# Altium PCB Motherboard.PcbDoc (part 1 of 2)
Units mm, origin at the board's own origin, x right, y up, seen from the top; angles counter-clockwise.
Board outline 237.88 x 115.44 mm, 4 copper layers (Top Layer, GND, 3V3, Bottom Layer), stack 0.603 mm thick; 165 components, 86 nets, 532 pads, 772 vias.
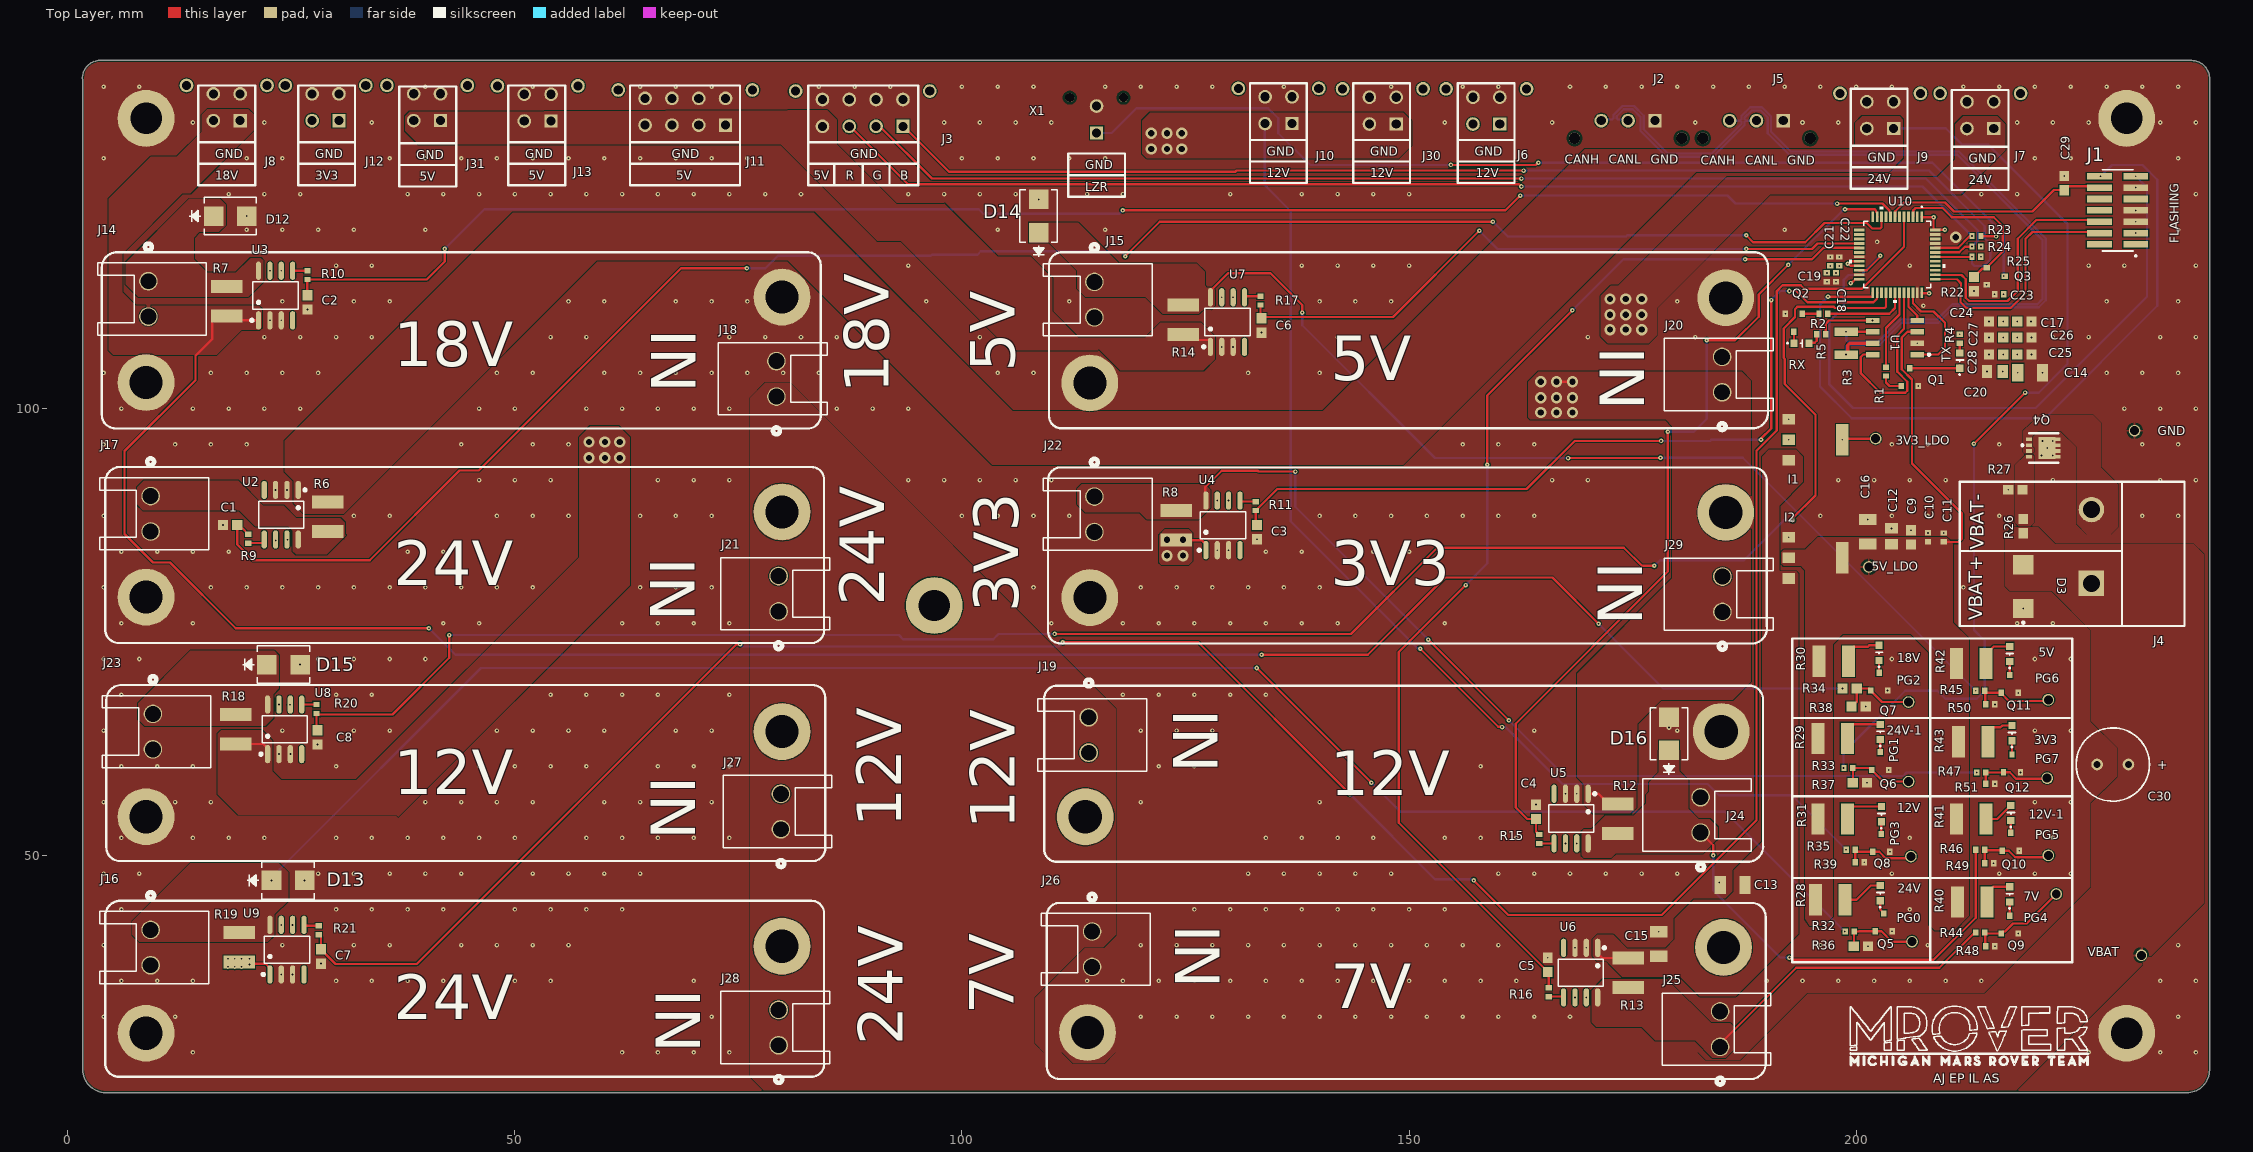
[diagram p0: Top Layer view]
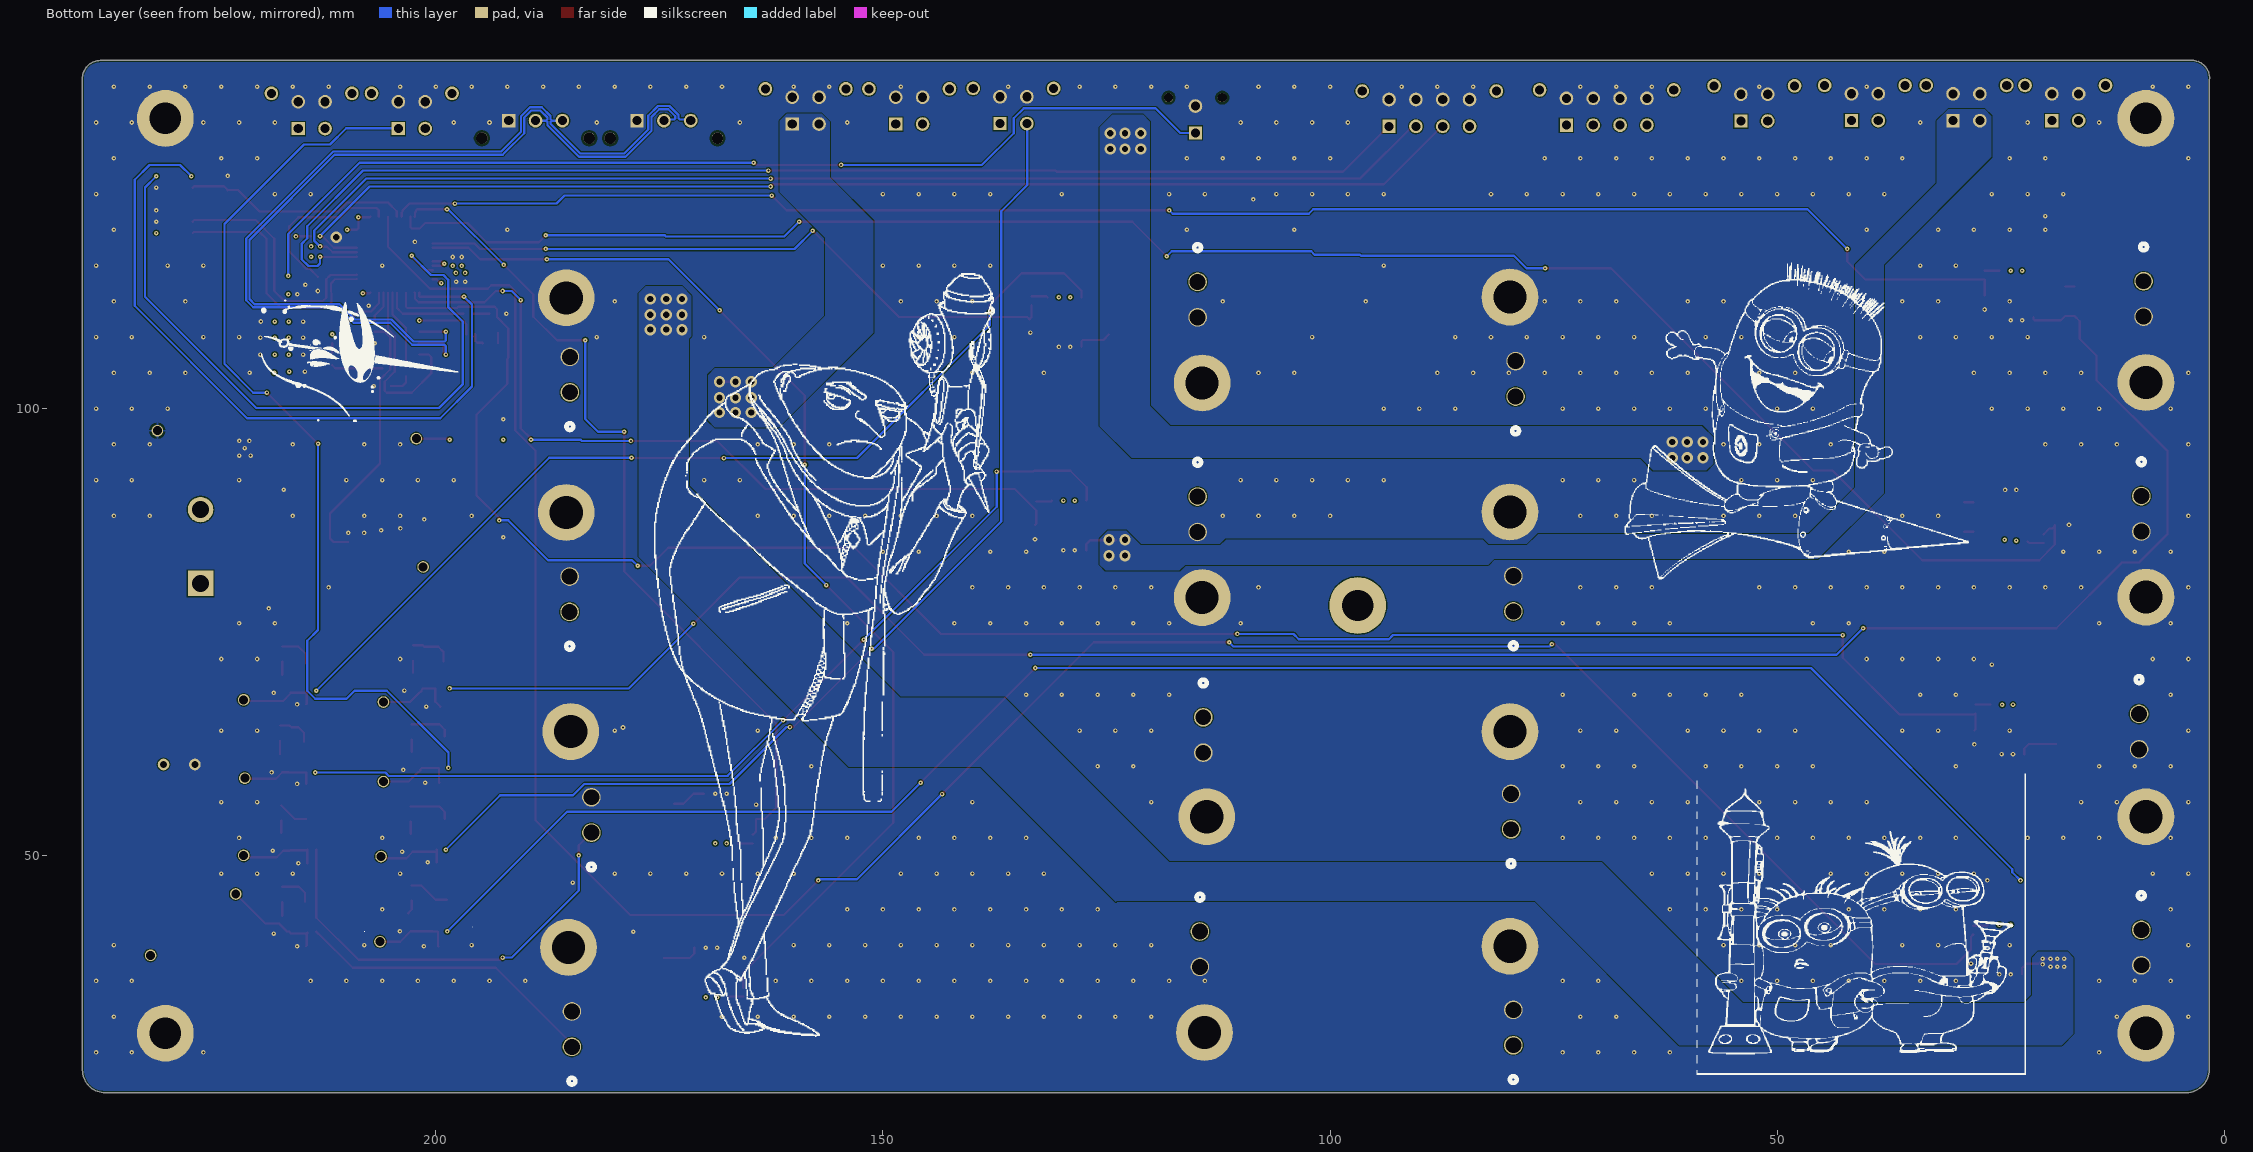
[diagram p1: Bottom Layer view, seen from below]
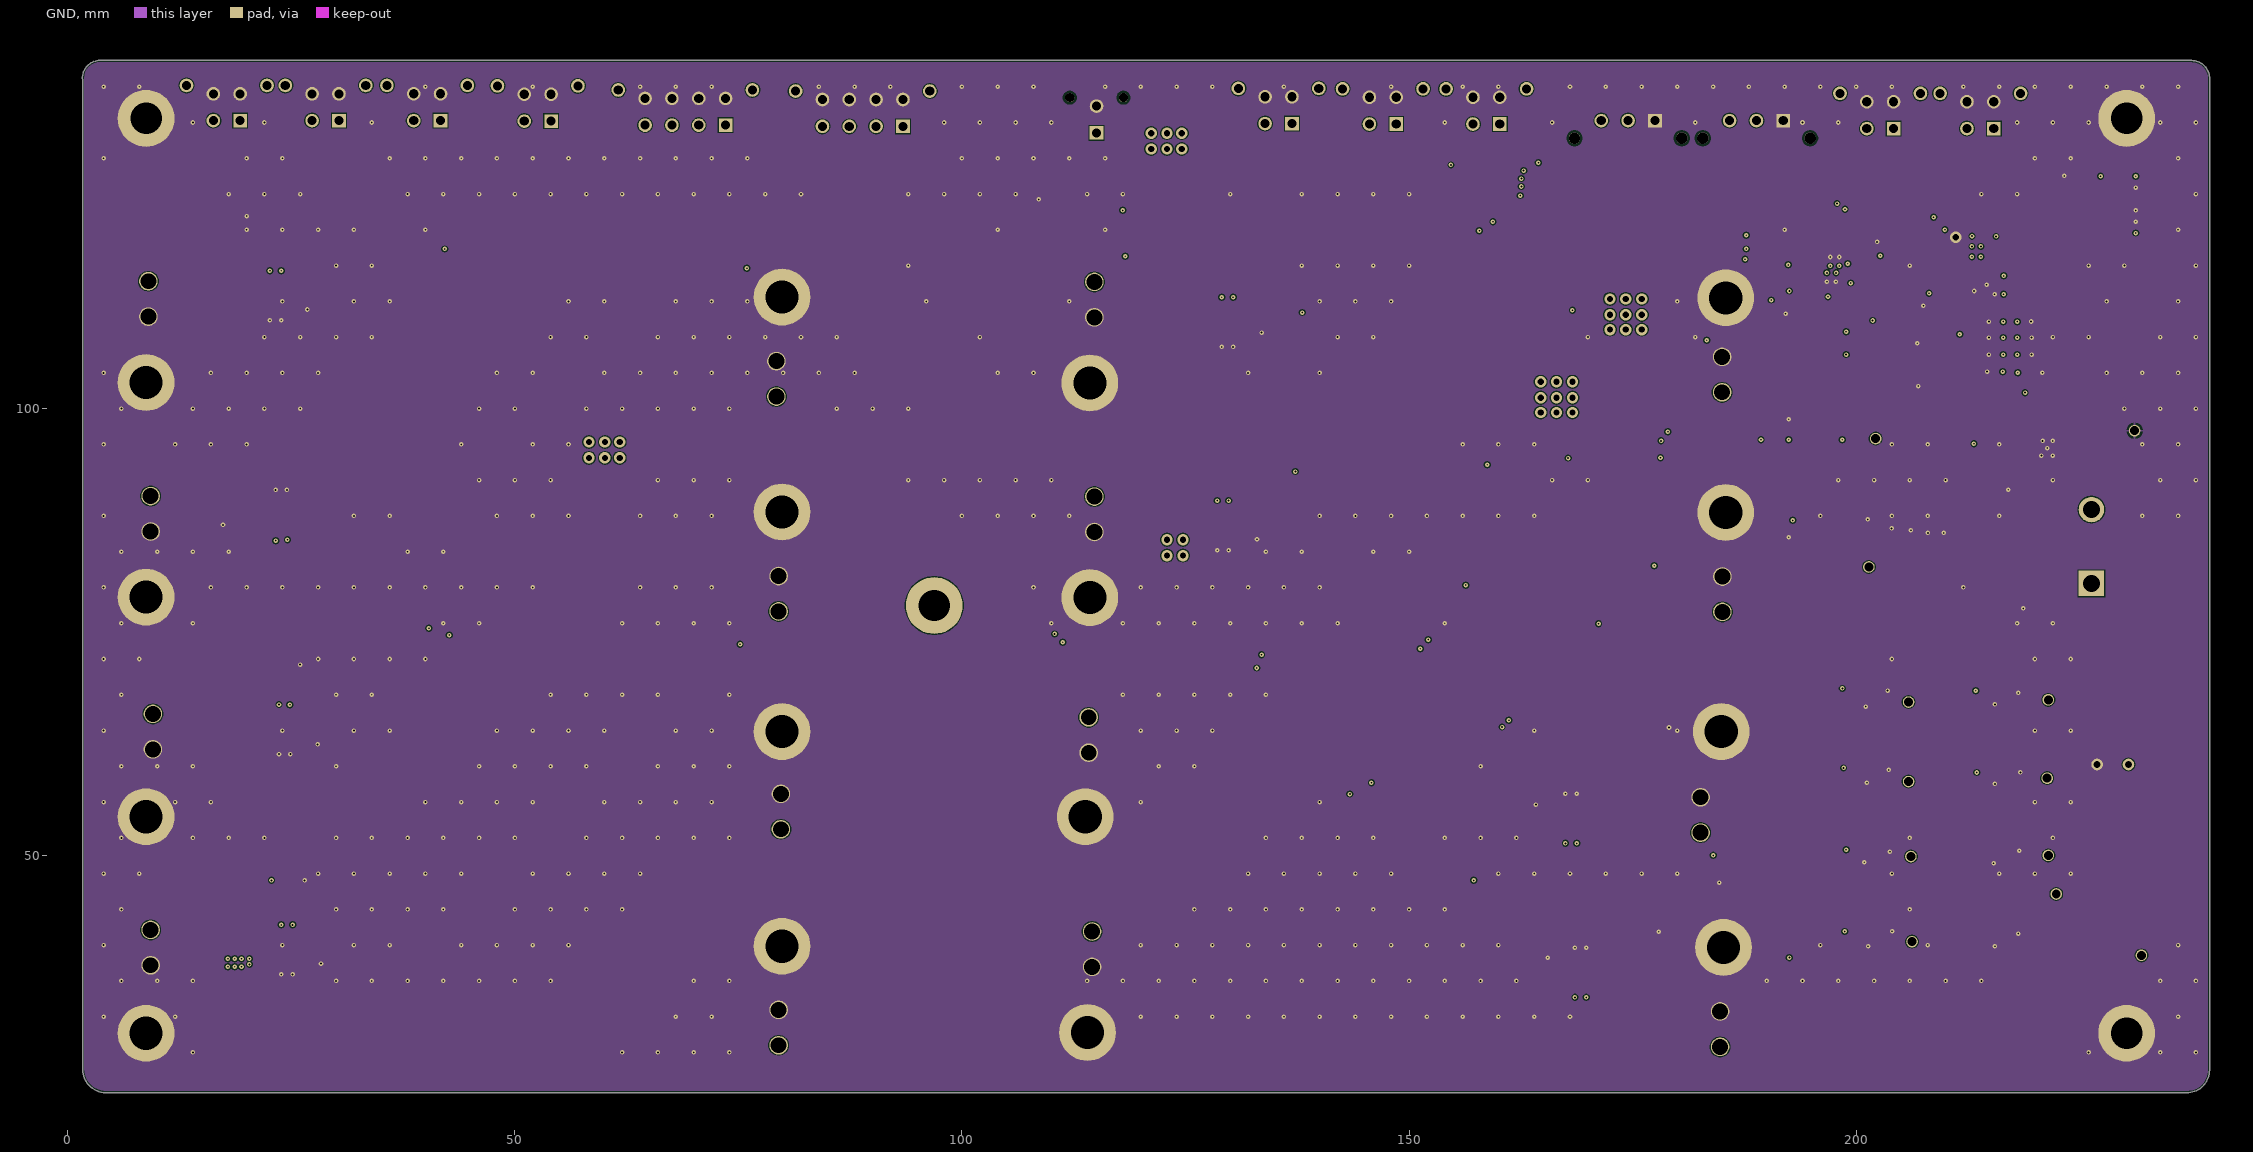
[diagram p2: GND]
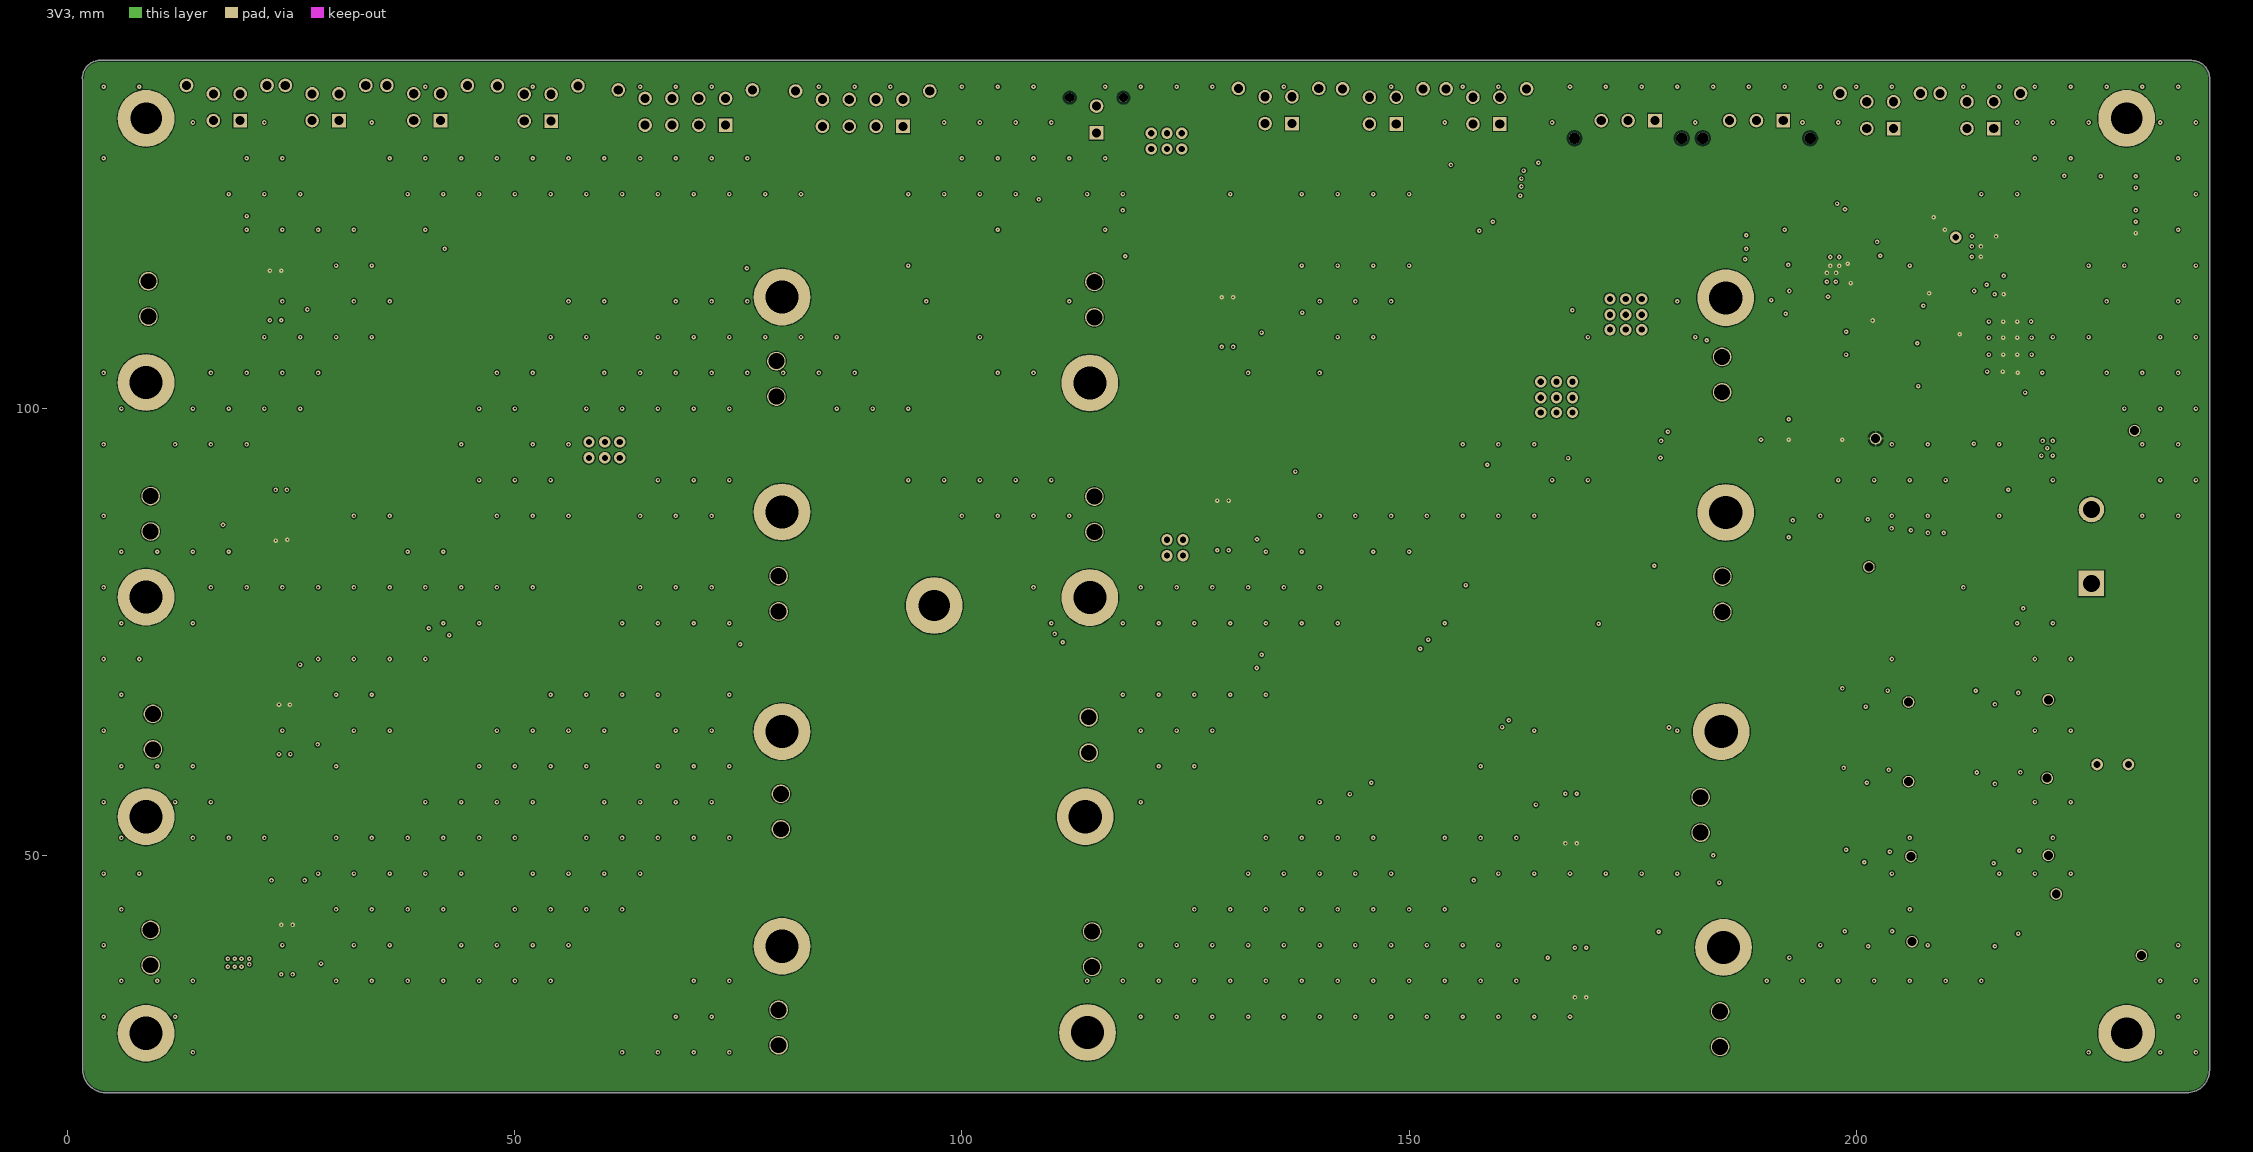
[diagram p3: 3V3]

## Layer stack, top to bottom
Top Solder: solder mask 0.0102, Solder Resist, Dk 3.5
Top Layer: signal copper 0.0356
Dielectric 2: prepreg 0.0711, PP-006, Dk 4.1
GND: signal copper 0.035
Dielectric 1: dielectric 0.32, FR-4, Dk 4.8
3V3: signal copper 0.035
Dielectric 3: prepreg 0.0711, PP-006, Dk 4.1
Bottom Layer: signal copper 0.0356
Bottom Solder: solder mask 0.0102, Solder Resist, Dk 3.5

## Board outline
4.191,23.495 cw(c4.318,26.162) 1.651,26.289 1.651,136.779 cw(c3.62,136.969) 3.429,138.938 237.363,138.938 cw(c237.49,136.906) 239.522,137.033 239.522,26.035 cw(c236.982,26.035) 236.982,23.495

## Design rules (kind name [scope] priority, off if disabled: settings)
BoardOutlineClearance [All] p1: gap=0.2 ignorepadtopadclearanceinfootprint=FALSE
Clearance "Stitching GND" [IsStitchingVia and InNet('GND') vs (IsVia and (Not IsStitchingVia)) Or IsPad] p1: gap=0.127 ignorepadtopadclearanceinfootprint=FALSE
Clearance [All] p2: gap=0.102 ignorepadtopadclearanceinfootprint=FALSE except(0.127: Arc-Via Track-Via SMDPad-Via THPad-Via Via-Via Via-Fill Via-Poly Via-Region Via-Text; 0.25: Arc-Hole Track-Hole SMDPad-Hole THPad-Hole Via-Hole Fill-Hole Poly-Hole Region-Hole Text-Hole)
ComponentClearance [All] p1: gap=0.102 collisioncheckmode=3 verticalgap=0.102 showdistances=TRUE
DiffPairsRouting [All] p1: maxlimit=0.102 minlimit=0.102 mostfreqgap=0.102 toplayer_minwidth=0.102 toplayer_maxwidth=1816.048 toplayer_prefwidth=0.102 midlayer1_minwidth=0.102 midlayer1_maxwidth=1816.048 midlayer1_prefwidth=0.102 midlayer2_minwidth=0.102 midlayer2_maxwidth=1816.048 midlayer2_prefwidth=0.102 bottomlayer_minwidth=0.102 bottomlayer_maxwidth=1816.048 bottomlayer_prefwidth=0.102 maxuncoupledlength=12.7
DiffPairsRouting USB [OnLayer('Top Layer') And InDifferentialPairClass('USB')] p2: maxlimit=0.127 minlimit=0.127 mostfreqgap=0.127 toplayer_maxgap=0.127 toplayer_prefgap=0.127 toplayer_minwidth=0.237 toplayer_maxwidth=0.237 toplayer_prefwidth=0.237 midlayer1_mingap=0.127 midlayer1_minwidth=0.089 midlayer1_maxwidth=0.089 midlayer1_prefwidth=0.089 midlayer2_mingap=0.127 midlayer2_minwidth=0.089 midlayer2_maxwidth=0.089 midlayer2_prefwidth=0.089 bottomlayer_maxgap=0.127 bottomlayer_prefgap=0.127 bottomlayer_minwidth=0.237 bottomlayer_maxwidth=0.237 bottomlayer_prefwidth=0.237 impedanceprofiledriven=TRUE impedanceprofileid={C8994B27-2D6B-4B4B-A1C4-DCAF0529D0FB} maxuncoupledlength=12.7
Height [All] p1: minheight=0 maxheight=1816.048 prefheight=12.7
HoleSize [All] p1: absolutevalues=TRUE maxlimit=6.3 minlimit=0.2 maxpercent=80.000 minpercent=20.000
HoleToHoleClearance [All] p1: gap=0.25 allowstackedmicrovias=FALSE
MinimumAnnularRing [All] p1: minimumring=0.076
MinimumSolderMaskSliver [All] p1: minsoldermaskwidth=0
PlaneClearance [All] p1: clearance=0.102
PlaneConnect PlaneConnectPowerPads [InPadClass('PowerPads')] p1: planeconnectstyle=Direct reliefexpansion=0.508 reliefentries=4 reliefconductorwidth=0.254 reliefairgap=0.254
PlaneConnect [All] p2: planeconnectstyle=Direct reliefexpansion=0.3 reliefentries=4 reliefconductorwidth=0.102 reliefairgap=0.102
PolygonConnect PolygonConnectPowerPads [All vs (InPadClass('PowerPads'))] p1: connectstyle=Direct reliefconductorwidth=0.254 reliefentries=4 polygonreliefangle="90 Angle" airgapwidth=0.254
PolygonConnect [All] p2: connectstyle=Direct reliefconductorwidth=0.102 reliefentries=4 polygonreliefangle="90 Angle" airgapwidth=0.102
RoutingVias [All] p1: holewidth=0.305 width=0.605 viastyle="Through Hole" minholewidth=0.3 minwidth=0.6 maxholewidth=0.405 maxwidth=0.705
SilkToSilkClearance [All] p1 off: silktosilkclearance=0.254
SilkToSolderMaskClearance [IsPad] p1 off: minsilkscreentomaskgap=0.254 clearancetoexposedcopper=TRUE
SolderMaskExpansion [All] p1: expansion=0.075 istentingtop=FALSE
SupplyNets "Schematic Supply Nets_21" [InNet('12V_FANS_C')] p1: voltage=0.000
SupplyNets "Schematic Supply Nets_20" [InNet('24V_ELSE_IN')] p2: voltage=0.000
SupplyNets "Schematic Supply Nets_19" [InNet('5V_BUCK_C')] p3: voltage=0.000
SupplyNets "Schematic Supply Nets_18" [InNet('7V_IN')] p4: voltage=0.000
SupplyNets "Schematic Supply Nets_17" [InNet('3V3_IN')] p5: voltage=0.000
SupplyNets "Schematic Supply Nets_16" [InNet('VBAT')] p6: voltage=0.000
SupplyNets "Schematic Supply Nets_15" [InNet('18V_BUCK_C')] p7: voltage=0.000
SupplyNets "Schematic Supply Nets_14" [InNet('18V_IN')] p8: voltage=0.000
SupplyNets "Schematic Supply Nets_13" [InNet('24V_LA_IN')] p9: voltage=0.000
SupplyNets "Schematic Supply Nets_12" [InNet('12V_ELSE_IN')] p10: voltage=0.000
SupplyNets "Schematic Supply Nets_11" [InNet('3V3_AUTONLED_C')] p11: voltage=0.000
SupplyNets "Schematic Supply Nets_10" [InNet('24V_BUCK_LA_C')] p12: voltage=0.000
SupplyNets "Schematic Supply Nets_9" [InNet('12V_REST_C')] p13: voltage=0.000
SupplyNets "Schematic Supply Nets_8" [InNet('5V_IN')] p14: voltage=0.000
SupplyNets "Schematic Supply Nets_7" [InNet('VBAT_MCU')] p15: voltage=0.000
SupplyNets "Schematic Supply Nets_6" [InNet('7V_BUCK_C')] p16: voltage=0.000
SupplyNets "Schematic Supply Nets_5" [InNet('5V_LDO')] p17: voltage=0.000
SupplyNets "Schematic Supply Nets_4" [InNet('24V_BUCK_C')] p18: voltage=0.000
SupplyNets "Schematic Supply Nets_2" [InNet('12V_FANS_IN')] p19: voltage=0.000
SupplyNets "Schematic Supply Nets_3" [InNet('GND')] p20: voltage=0.000
Width [All] p1: maxlimit=0.508 minlimit=0.102 preferedwidth=0.254 minimp=50.000000 maximp=50.000000 favimp=50.000000
20 further rules are at their usual default settings.

## Classes and differential pairs
component class PGOODs: 1mm 3V3 5V 7V 12V 12V-1 18V 24V 24V-1 PG0 PG1 PG2 PG3 PG4 PG5 PG6 PG7 Q5 Q6 Q7 Q8 Q9 Q10 Q11 Q12 R28 R29 R30 R31 R32 R33 R34 R35 R36 R37 R38 R39 R40 R41 R42 R43 R44 R45 R46 R47 R48 R49 R50 R51
component class Other_Connectors: C30 D3 D12 D13 D14 D15 D16 GND J2 J3 J4 J5 J6 J7 J8 J9 J10 J11 J12 J13 J30 J31 Q4 R26 R27 VBAT X1
component class MCU: C21 C22 C23 C24 C25 C26 C27 C28 C29 J1 Q3 R22 R23 R24 R25 U10
component class LDOs: 3V3_LDO 5V_LDO C9 C10 C11 C12 C13 C14 C15 C16 C17 C18 C19 C20 I1 I2
component class Daughter_Card_Connectors: J14 J15 J16 J17 J18 J19 J20 J21 J22 J23 J24 J25 J26 J27 J28 J29
component class Current_Sensing: C1 C2 C3 C4 C5 C6 C7 C8 R6 R7 R8 R9 R10 R11 R12 R13 R14 R15 R16 R17 R18 R19 R20 R21 U2 U3 U4 U5 U6 U7 U8 U9
component class CAN_Transciever: Q1 Q2 R1 R2 R3 R4 R5 RX TX U1
differential pair CAN: +CAN_P -CAN_N

## Components (designator, comment, footprint, x,y, rotation, side; value= is the part's Value field where it differs from the comment)
3V3 "BL-HKC36G-AV-TRB" LED-0603 218.175,62.276 r90 top
3V3_LDO "5003" TEST-POINT-0001 202.184,96.647 r270 top
5V "BL-HKC36G-AV-TRB" LED-0603 217.921,71.115 r90 top
5V_LDO "5003" TEST-POINT-0001 201.422,82.296 r0 top
7V "BL-HKC36G-AV-TRB" LED-0603 217.921,44.242 r90 top
12V "BL-HKC36G-AV-TRB" LED-0603 203.57,53.208 r90 top (schematic designator 12V-0)
12V-1 "BL-HKC36G-AV-TRB" LED-0603 218.048,53.335 r90 top
18V "BL-HKC36G-AV-TRB" LED-0603 203.316,71.242 r90 top
24V "BL-HKC36G-AV-TRB" LED-0603 203.443,44.369 r90 top (schematic designator 24V-0)
24V-1 "BL-HKC36G-AV-TRB" LED-0603 203.443,62.403 r90 top
C1 "CC0603KRX7R0BB104" CAP-0603 18.161,86.995 r180 top
C2 "CC0603KRX7R0BB104" CAP-0603 26.797,111.887 r270 top
C3 "CC0603KRX7R0BB104" CAP-0603 132.994,86.183 r270 top
C4 "CC0603KRX7R0BB104" CAP-0603 164.186,54.917 r90 top
C5 "CC0603KRX7R0BB104" CAP-0603 165.506,37.796 r90 top
C6 "CC0603KRX7R0BB104" CAP-0603 133.502,109.297 r270 top
C7 "CC0603KRX7R0BB104" CAP-0603 28.321,38.735 r270 top
C8 "CC0603KRX7R0BB104" CAP-0603 27.94,63.246 r270 top
C9 "CC0603KRX5R6BB106" CAP-0603 206.121,85.598 r270 top
C10 "CC0402KRX7R7BB104" CAP-0402 208.026,85.606 r270 top
C11 "CC0402KRX7R7BB104" CAP-0402 209.804,85.598 r270 top
C12 "CC0805JRNPO9BN471" CAP-0805 203.962,85.725 r270 top
C13 "293D106X9016A2TE3" CAP-1206 186.182,46.736 r0 top
C14 "293D106X9016A2TE3" CAP-1206 219.456,104.013 r180 top
C15 "293D106X9016A2TE3" CAP-1206 177.927,40.132 r270 top
C16 "293D106X9016A2TE3" CAP-1206 201.295,86.233 r270 top
C17 "CC0603KRX5R6BB106" CAP-0603 218.821,109.728 r180 top
C18 "CC0402KRX7R7BB104" CAP-0402 197.739,114.681 r90 top
C19 "CC0402KRX7R7BB104" CAP-0402 196.723,114.681 r90 top
C20 "CC0805JRNPO9BN471" CAP-0805 215.519,104.14 r0 top
C21 "CC0402KRX7R7BB104" CAP-0402 197.104,116.459 r270 top
C22 "CC0402KRX7R7BB104" CAP-0402 198.12,116.459 r270 top
C23 "CC0402KRX7R7BB104" CAP-0402 215.989,112.788 r0 top
C24 "CC0603KRX5R8BB475" CAP-0603 215.646,109.728 r0 top
C25 "CC0603KPX7R9BB103" CAP-0603 218.821,106.045 r180 top
C26 "CC0603KRX7R7BB105" CAP-0603 218.821,107.95 r180 top
C27 "CC0603KPX7R9BB103" CAP-0603 215.646,107.95 r0 top
C28 "CC0603KRX7R7BB105" CAP-0603 215.646,106.045 r0 top
C29 "CC0603KRX7R0BB104" CAP-0603 223.266,125.222 r270 top
C30 "860040674004" WCAP-ATUL_8X11.5(DXL) 228.699,60.198 r0 top
D3 "SMBJ40CA" "DO-214AA (SMBJ)" 218.694,80.137 r270 top
D12 "SMBJ18" SMBJSERIES_LTF 18.161,121.539 r0 top
D13 "SMBJ24" SMBJSERIES_LTF 24.638,47.244 r0 top
D14 "SMBJ5.0" SMBJSERIES_LTF 108.585,121.539 r90 top
D15 "SMBJ12" SMBJSERIES_LTF 24.13,71.374 r0 top
D16 "SMBJ12" SMBJSERIES_LTF 179.07,63.627 r90 top
GND "5003" TEST-POINT-0001 231.14,97.536 r0 top
I1 "LM1117IMPX-3.3/NOPB" IC-SOT-223-4 195.453,96.52 r0 top
I2 "LM1117MPX-5.0/NOPB" IC-SOT-223-4 195.453,83.312 r0 top
J1 "FTSH-107-01-L-DV-K-A" SAMTEC_FTSH-107-01-L-DV-K 229.235,122.174 r90 top
J2 "Molex 43650-0315" 43650-0315 174.498,132.207 r0 top
J3 "Molex 43045-0812" CONN-8POS-0001 88.9,131.572 r0 top
J4 "1546927-2" CONN-1546927-2 226.314,84.582 r180 top
J5 "Molex 43650-0315" 43650-0315 188.849,132.207 r0 top
J6 "Molex 43045-0412" CONN-4POS-0002 158.647,131.826 r0 top
J7 "Molex 43045-0412" CONN-4POS-0002 213.892,131.318 r0 top
J8 "Molex 43045-0412" CONN-4POS-0002 17.78,132.207 r0 top
J9 "Molex 43045-0412" CONN-4POS-0002 202.692,131.318 r0 top
J10 "Molex 43045-0412" CONN-4POS-0002 135.406,131.874 r0 top
J11 "Molex 43045-0812" CONN-8POS-0001 69.064,131.699 r0 top
J12 "Molex 43045-0412" CONN-4POS-0002 28.829,132.207 r0 top
J13 "Molex 43045-0412" CONN-4POS-0002 52.554,132.159 r0 top
J14 "09483026" CONN_SDA-41815_02_TE_H_MOL 9.017,114.247 r270 top
J15 "09483026" CONN_SDA-41815_02_TE_H_MOL 114.808,114.171 r270 top
J16 "09483026" CONN_SDA-41815_02_TE_H_MOL 9.271,41.707 r270 top
J17 "09483026" CONN_SDA-41815_02_TE_H_MOL 9.271,90.221 r270 top
J18 "09483026" CONN_SDA-41815_02_TE_H_MOL 79.248,101.348 r90 top
J19 "09483026" CONN_SDA-41815_02_TE_H_MOL 114.173,65.481 r270 top
J20 "09483026" CONN_SDA-41815_02_TE_H_MOL 185.014,101.828 r90 top
J21 "09483026" CONN_SDA-41815_02_TE_H_MOL 79.502,77.318 r90 top
J22 "09483026" CONN_SDA-41815_02_TE_H_MOL 114.808,90.165 r270 top
J23 "09483026" CONN_SDA-41815_02_TE_H_MOL 9.525,65.86 r270 top
J24 "09483026" CONN_SDA-41815_02_TE_H_MOL 182.603,52.578 r90 top
J25 "09483026" CONN_SDA-41815_02_TE_H_MOL 184.785,28.626 r90 top
J26 "09483026" CONN_SDA-41815_02_TE_H_MOL 114.554,41.527 r270 top
J27 "09483026" CONN_SDA-41815_02_TE_H_MOL 79.756,52.959 r90 top
J28 "09483026" CONN_SDA-41815_02_TE_H_MOL 79.502,28.804 r90 top
J29 "09483026" CONN_SDA-41815_02_TE_H_MOL 185.039,77.264 r90 top
J30 "Molex 43045-0412" CONN-4POS-0002 147.066,131.826 r0 top
J31 "Molex 43045-0412" CONN-4POS-0002 40.187,132.21 r0 top
PG0 "5003" TEST-POINT-0001 206.248,40.386 r0 top
PG1 "5003" TEST-POINT-0001 205.867,58.293 r0 top
PG2 "5003" TEST-POINT-0001 205.867,67.183 r0 top
PG3 "5003" TEST-POINT-0001 206.121,49.911 r0 top
PG4 "5003" TEST-POINT-0001 222.377,45.72 r0 top
PG5 "5003" TEST-POINT-0001 221.488,50.038 r90 top
PG6 "5003" TEST-POINT-0001 221.488,67.437 r90 top
PG7 "5003" TEST-POINT-0001 221.361,58.674 r90 top
Q1 "T2N7002AK,LM" IC-SOT23-3 205.994,103.521 r0 top
Q2 "T2N7002AK,LM" IC-SOT23-3 193.04,109.601 r180 top
Q3 "T2N7002AK,LM" NMOS-SOT23-3 215.608,114.82 r270 top
Q4 "CSD18543Q3AT" IC-8VSONCLIP 218.452,97.427 r270 top
Q5 "T2N7002AK,LM" IC-SOT23-3 203.073,42.545 r0 top
Q6 "T2N7002AK,LM" IC-SOT23-3 202.692,60.595 r0 top
Q7 "T2N7002AK,LM" IC-SOT23-3 202.565,69.469 r0 top
Q8 "T2N7002AK,LM" IC-SOT23-3 202.819,51.435 r0 top
Q9 "T2N7002AK,LM" IC-SOT23-3 217.17,42.291 r0 top
Q10 "T2N7002AK,LM" IC-SOT23-3 217.297,51.562 r0 top
Q11 "T2N7002AK,LM" IC-SOT23-3 217.17,69.215 r0 top
Q12 "T2N7002AK,LM" IC-SOT23-3 217.424,60.325 r0 top
R1 "RC0402FR-07470RL" RES-0402 203.327,104.148 r90 top
R2 "RC0402FR-07470RL" RES-0402 196.342,110.617 r0 top
R3 "RC1210FR-07120RL" RES-1210 198.882,107.315 r90 top
R4 "RC0402FR-07100RL" RES-0402 211.582,107.823 r90 top
R5 "RC0402FR-07100RL" RES-0402 196.096,108.323 r0 top
R6 "CSNL2512FTL500" RES-2512 29.083,87.884 r270 top
R7 "CSNL2512FTL500" RES-2512 17.78,112.014 r90 top
R8 "CSNL2512FTL500" RES-2512 123.977,86.946 r90 top
R9 "RC0402FR-0710KL" RES-0402 20.193,85.463 r90 top
R10 "RC0402FR-0710KL" RES-0402 26.797,114.935 r270 top
R11 "RC0402FR-0710KL" RES-0402 132.867,89.104 r270 top
R12 "CSNL2512FTL500" RES-2512 173.33,54.155 r270 top
R13 "CSNL2512FTL500" RES-2512 174.523,36.907 r270 top
R14 "CSNL2512FTL500" RES-2512 124.739,109.932 r90 top
R15 "RC0402FR-0710KL" RES-0402 164.567,51.869 r90 top
R16 "RC0402FR-0710KL" RES-0402 165.633,34.748 r90 top
R17 "RC0402FR-0710KL" RES-0402 133.375,112.083 r270 top
R18 "CSNL2512FTL500" RES-2512 18.796,64.135 r90 top
R19 "CSNL2512FTL500" RES-2512 19.177,39.751 r90 top
R20 "RC0402FR-0710KL" RES-0402 27.813,66.413 r270 top
R21 "RC0402FR-0710KL" RES-0402 28.067,41.656 r270 top
R22 "RMCF0603ZT0R00" RES-0603 213.195,113.931 r90 top
R23 "RC0402FR-0710KL" RES-0402 213.458,119.294 r0 top
R24 "RC0402FR-0710KL" RES-0402 213.449,118.137 r0 top
R25 "RC0402FR-0710KL" RES-0402 213.449,116.979 r0 top
R26 "RC0603FR-07200KL" RES-0603 218.694,86.868 r90 top
R27 "RC0603FR-07100KL" RES-0603 217.805,90.932 r180 top
R28 "SR2512JK-7W100RL" RES-2512 197.104,45.085 r180 top
R29 "SR2512JK-7W100RL" RES-2512 197.358,63.119 r180 top
R30 "SR2512JK-7W100RL" RES-2512 197.485,71.755 r180 top
R31 "SR2512JK-7W100RL" RES-2512 197.358,54.102 r180 top
R32 "RC0603FR-0722KL" RES-0402 199.271,41.529 r180 top
R33 "*RC0402JR-07150KL" RES-0402 199.136,59.817 r180 top
R34 "RC0603FR-07107KL" RES-0603 199.263,68.707 r180 top
R35 "ERJ-2RKF2743X" RES-0402 199.39,50.673 r180 top
R36 "RC0603FR-0722KL" RES-0603 200.533,39.878 r180 top
R37 "RC0603FR-0722KL" RES-0603 200.406,58.166 r180 top
R38 "RC0603FR-0722KL" RES-0603 200.279,66.675 r180 top
R39 "RC0402FR-07100KL" RES-0402 200.406,49.276 r180 top
R40 "SR2512JK-7W100RL" RES-2512 212.979,44.831 r180 top
R41 "SR2512JK-7W100RL" RES-2512 212.852,54.102 r180 top
R42 "SR2512JK-7W100RL" RES-2512 212.852,71.501 r180 top
R43 "SR2512JK-7W100RL" RES-2512 213.106,62.738 r180 top
R44 "RC0402FR-0710KL" RES-0402 213.868,41.402 r180 top
R45 "RC0402FR-0710KL" RES-0402 213.868,68.453 r180 top
R46 "ERJ-2RKF2743X" RES-0402 213.868,50.673 r180 top
R47 "RC0402FR-071KL" RES-0402 213.995,59.309 r180 top
R48 "RC0402FR-0710KL" RES-0402 215.011,39.878 r180 top
R49 "RC0402FR-07100KL" RES-0402 214.876,49.149 r180 top
R50 "RC0402FR-0710KL" RES-0402 215.011,66.929 r180 top
R51 "RC0402FR-0710KL" RES-0402 215.011,58.039 r180 top
RX "BL-HKC36G-AV-TRB" LED-0603 192.451,106.564 r0 top
TX "BL-HKC36G-AV-TRB" LED-0603 212.333,103.932 r90 top
U1 "TCAN1044VDRQ1" IC-8SOIC 204.343,107.95 r90 top
U2 "AD8418AWBRZ-RL" IC-CURR 23.876,88.138 r180 top
U3 "AD8418AWBRZ-RL" IC-CURR 23.241,112.649 r0 top
U4 "AD8418AWBRZ-RL" IC-CURR 129.184,86.945 r0 top
U5 "AD8418AWBRZ-RL" IC-CURR 168.123,54.155 r180 top
U6 "AD8418AWBRZ-RL" IC-CURR 169.189,36.929 r180 top
U7 "AD8418AWBRZ-RL" IC-CURR 129.692,109.678 r0 top
U8 "AD8418AWBRZ-RL" IC-CURR 24.257,64.135 r0 top
U9 "AD8418AWBRZ-RL" IC-CURR 24.511,39.497 r0 top
U10 "STM32G431CBT6" IC-LQFP48 204.597,117.221 r270 top
VBAT "5003" TEST-POINT-0001 231.902,38.862 r270 top
X1 "Molex - Micro-Fit 3.0 Series connector,  3.00mm (0.118\") pitch header, 2 positions." 43045-0212 115.053,130.836 r0 top

## Footprints (in the part's own frame and the unit in brackets; to place one, negate y for a bottom-side part, rotate by r counter-clockwise, add the part's x,y. Pads: shape width x height; smd on the part's side, far side on the other; paste and mask are expansions set on the pad)
43045-0212 [mm]
  round 1.02 hole 1.02 unplated: 1(-3,3.94) 1(3,3.94)
  rect 1.482x1.482 / inner rect 1.524x1.524 / far side rect 1.482x1.482 hole 1.02: P$1(0,0)
  round 1.53 / inner round 1.524 / far side round 1.53 hole 1.02: P$2(0,3)
43650-0315 [mm]
  round 1.27 hole 1.27 unplated: 1(-6,-1.96) 1(6,-1.96)
  rect 1.482x1.482 / inner rect 1.524x1.524 / far side rect 1.482x1.482 hole 1.02: P$1(3,0)
  round 1.53 / inner round 1.524 / far side round 1.53 hole 1.02: P$2(0,0) P$3(-3,0)
  body extent -6.32,-2.47 6.33,3.14, height 10.03
CAP-0402 [mm]
  rect 0.6x0.7 smd: 1(-0.5,0) 2(0.5,0)
  body extent -0.5,-0.22 0.5,0.23, height 0.5
CAP-0603 [mm]
  rect 1.15x1.1 smd: 1(-0.8,0) 2(0.8,0)
  body extent -0.8,-0.45 0.8,0.45, height 0.8
CAP-0805 [mm]
  rect 1.16x1.47 smd: 1(-0.88,0) 2(0.88,0)
  body extent -1,-0.63 1,0.63, height 0.94
CAP-1206 [mm]
  rect 1.25x2 smd: 1(-1.375,0) 2(1.375,0)
  body extent -1.6,-0.8 1.6,0.8, height 1.5
CONN-4POS-0002 [mm]
  round 1.53 hole 1.02 unplated: 1(-4.5,3.94) 1(4.5,3.94)
  rect 1.482x1.482 / inner rect 1.524x1.524 / far side rect 1.482x1.482 hole 1.02: 1(1.5,0)
  round 1.53 / inner round 1.524 / far side round 1.53 hole 1.02: 2(-1.5,0) 3(1.5,3) 4(-1.5,3)
  body extent -5.07,-2.45 5.08,6.32, height 10.03
CONN-8POS-0001 [mm]
  rect 1.482x1.482 / inner rect 1.524x1.524 / far side rect 1.482x1.482 hole 1.02: 1(4.5,0)
  round 1.53 / inner round 1.524 / far side round 1.53 hole 1.02: 2(1.5,0) 3(-1.5,0) 4(-4.5,0) 5(4.5,3) 6(1.5,3) 7(-1.5,3) 8(-4.5,3)
  round 1.53 hole 1.02 unplated: ""(-7.5,3.94) ""(7.5,3.94)
  body extent -8.07,-2.45 8.08,6.32, height 10.03
CONN-1546927-2 [mm]
  rect 2.85x2.85 hole 1.9: 1(0,4.127)
  round 2.85 hole 1.9: 2(0,-4.127)
  body extent -11.57,-8.85 4.49,8.85, height 14.99
CONN_SDA-41815_02_TE_H_MOL [mil]
  round 82 hole 69.88 paste-99999 mask+0: 1(0,0) 2(155.91,0)
  silkscreen extent -166,-224 237,255
"DO-214AA (SMBJ)" [mm]
  rect 2.16x2.26 smd: 1(-2.416,0) 2(2.484,0)
  silkscreen extent 3.94,-0.12 4.19,0.13, body extent -2.72,-1.95 2.78,1.95, height 2.45
IC-8SOIC [mm]
  rect 0.6x1.5 smd: 1(-1.905,-2.5) 2(-0.635,-2.5) 3(0.635,-2.5) 4(1.905,-2.5) 5(1.905,2.5) 6(0.635,2.5) 7(-0.635,2.5) 8(-1.905,2.5)
  silkscreen extent -2.03,-3.94 -1.78,-3.69, body extent -2.45,-3 2.45,3, height 1.75
IC-8VSONCLIP [mm]
  rect 0.4x0.7 smd paste-100 mask+0.05: 1(2.812,0.877) 2(0.862,0.877) 2(1.512,0.877) 2(2.162,0.877) 3(0.862,4.077) 3(1.512,4.077) 3(2.162,4.077) 3(2.812,4.077)
  rect 2.45x1.9 smd paste-100 mask+0.05: 3(1.837,2.917)
  silkscreen extent 0.19,0.03 3.49,4.18, body extent 0.18,0.89 3.48,4.19, height 1.1
IC-CURR [mm]
  oval 0.588x2.045 smd paste+0 mask+0.051: 1(-1.905,-2.772) 2(-0.635,-2.772) 3(0.635,-2.772) 4(1.905,-2.772) 5(1.905,2.772) 6(0.635,2.772) 7(-0.635,2.772) 8(-1.905,2.772)
  silkscreen extent -2.8,-2.92 2.53,1.52
IC-LQFP48 [mm]
  rect 1.194x0.305 smd paste+0 mask+0: 1(-4.25,2.75) 2(-4.25,2.25) 3(-4.25,1.75) 4(-4.25,1.25) 5(-4.25,0.75) 6(-4.25,0.25) 7(-4.25,-0.25) 8(-4.25,-0.75) 9(-4.25,-1.25) 10(-4.25,-1.75) 11(-4.25,-2.25) 12(-4.25,-2.75) 25(4.25,-2.75) 26(4.25,-2.25) 27(4.25,-1.75) 28(4.25,-1.25) 29(4.25,-0.75) 30(4.25,-0.25) 31(4.25,0.25) 32(4.25,0.75) 33(4.25,1.25) 34(4.25,1.75) 35(4.25,2.25) 36(4.25,2.75)
  rect 0.305x1.194 smd paste+0 mask+0: 13(-2.75,-4.25) 14(-2.25,-4.25) 15(-1.75,-4.25) 16(-1.25,-4.25) 17(-0.75,-4.25) 18(-0.25,-4.25) 19(0.25,-4.25) 20(0.75,-4.25) 21(1.25,-4.25) 22(1.75,-4.25) 23(2.25,-4.25) 24(2.75,-4.25) 37(2.75,4.25) 38(2.25,4.25) 39(1.75,4.25) 40(1.25,4.25) 41(0.75,4.25) 42(0.25,4.25) 43(-0.25,4.25) 44(-0.75,4.25) 45(-1.25,4.25) 46(-1.75,4.25) 47(-2.25,4.25) 48(-2.75,4.25)
  silkscreen extent -5.43,-5.35 5.35,5.35, body extent -4.5,-4.5 4.5,4.5, height 1.6
IC-SOT23-3 [mm]
  rect 0.6x0.7 smd: 1(-0.95,-1) 2(0.95,-1) 3(0,1)
  body extent -1.46,-1.18 1.46,1.19, height 1.12
IC-SOT-223-4 [mm]
  rect 1.4x1.2 smd mask+0.07: 1(-3,2.3) 3(-3,-2.3) 4(-3,0)
  rect 1.4x3.5 smd: 2(3,0)
  body extent -3.5,-3.25 3.5,3.25, height 1.68
LED-0603 [mm]
  rect 0.8x0.8 smd: 1(2.291,0.751) 2(0.589,0.751)
  silkscreen extent -0.2,0.34 1.52,1.13, body extent 0.65,0.36 2.25,1.16, height 0.39
NMOS-SOT23-3 [mm]
  rect 0.6x0.7 smd: 1(-0.95,-1) 2(0.95,-1) 3(0,1)
  body extent -1.46,-1.18 1.46,1.19, height 1.12
RES-0402 [mm]
  rect 0.6x0.7 smd: 1(-0.5,0) 2(0.5,0)
  body extent -0.5,-0.25 0.5,0.25, height 0.3
RES-0603 [mm]
  rect 1.15x1.1 smd: 1(-0.8,0) 2(0.8,0)
  body extent -0.8,-0.4 0.8,0.4, height 0.43
RES-1210 [mm] "Chip Resistor, 2-Leads, Body 3.10x2.60mm, IPC High Density"
  rect 0.95x2.6 smd: 1(-1.275,0) 2(1.275,0)
  body extent -1.6,-1.35 1.6,1.35, height 0.6
RES-2512 [mm]
  rect 1.45x3.5 smd: 1(-1.65,0) 2(1.65,0)
SAMTEC_FTSH-107-01-L-DV-K [mm]
  rect 0.74x2.79 smd: 01(-3.81,-2.035) 02(-3.81,2.035) 03(-2.54,-2.035) 04(-2.54,2.035) 05(-1.27,-2.035) 06(-1.27,2.035) 07(0,-2.035) 08(0,2.035) 09(1.27,-2.035) 10(1.27,2.035) 11(2.54,-2.035) 12(2.54,2.035) 13(3.81,-2.035) 14(3.81,2.035)
  silkscreen extent -5.19,-2.13 4.53,1.72, body extent -4.44,-2.82 4.44,3.02, height 5.96
SMBJSERIES_LTF [mil]
  rect 86x86 smd paste+0 mask+0: 1(-73,0) 2(73,0)
  silkscreen extent -180,-82 115,82, body extent -110,-77 110,77, height 98
TEST-POINT-0001 [mm] "2024 miniature test point"
  round 1.3 hole 1: 1(0,0)
  body extent -1.27,-1.27 1.27,1.27, height 4.57
WCAP-ATUL_8X11.5(DXL) [mm]
  round 1.308 hole 0.8: 1(1.75,0) 2(-1.75,0)
  silkscreen extent -4.1,-4.1 4.1,4.1

## Part data
3V3 5V 7V 12V 12V-1 18V 24V 24V-1 RX TX: library part LED-0001, "LED YELLOW CLEAR 0603 SMD", Forward Current=30mA, Forward Voltage=2V, ComponentLink1Description=Datasheet, ComponentLink1URL=https://www.americanbrightled.com/pdffiles/led-components/smt/BL-HKC36G-AV-TRB.pdf
3V3_LDO 5V_LDO GND PG0 PG1 PG2 PG3 PG4 PG5 PG6 PG7 VBAT: library part TEST-POINT-0001, "Oranange PC Test Point, Miniature Phoisphor Bronze Silver Plating Through Hole Mounting Type"
C1 C2 C3 C4 C5 C6 C7 C8 C29: library part CAP-100N-0001, "CAP CER 0.1UF 100V X7R 0603", Capacitance="100 nF", Voltage="100 V", ComponentLink1Description=Datasheet, ComponentLink1URL=https://www.yageo.com/upload/media/product/app/datasheet/mlcc/upy-np0x7r_mv_100-to-630v.pdf, Device Class=Ceramic, Size=0603
C9 C17: library part CAP-10U-0001, "CAP CER 10UF 10V X5R 0603", Capacitance="10 uF", Voltage=10V, ComponentLink1Description=Datasheet, ComponentLink1URL=https://www.yageo.com/upload/media/product/app/datasheet/mlcc/upy-gphc_x5r_4v-to-50v.pdf, Device Class=Ceramic, Size=0603
C10 C11 C18 C19 C21 C22 C23: library part CAP-0.1U-0001, "CAP CER 0.1UF 16V X7R 0402", Capacitance="100 nF", Voltage Rating="16 V", ComponentLink2Description=Datasheet, ComponentLink2URL=https://www.yageo.com/upload/media/product/productsearch/datasheet/mlcc/UPY-GPHC_X7R_6.3V-to-250V_24.pdf, Device Class=Ceramic, Size=0402
C12 C20: library part CAP-470P-0001, "CAP CER 470PF 50V C0G/NPO 0805", Capacitance="470 pF", Voltage=50V, ComponentLink1Description=Datasheet, ComponentLink1URL=https://www.yageo.com/upload/media/product/productsearch/datasheet/mlcc/UPY-GP_NP0_16V-to-50V_18.pdf, Device Class=Ceramic, Size=0805
C13 C14 C15 C16: library part CAP-10U-0004, "CAP TANT 10UF 10% 16V 1206", Capacitance="10 uF", Voltage=16V, ComponentLink1Description=Datasheet, ComponentLink1URL=https://www.lcsc.com/datasheet/lcsc_datasheet_2304140030_Vishay-Intertech-293D106X9016A2TE3_C110038.pdf, Device Class=Tantalum, Size=1206
C24: library part CAP-4.7U-0001, "CAP CER 4.7UF 25V X5R 0603", Capacitance="4.7 uF", Voltage=25V, Device Class=Ceramic, Size=0603
C25 C27: library part CAP-10N-0002, "CAP CER 10000PF 50V X7R 0603", Capacitance="10 nF", Voltage="50 V", ComponentLink2Description=Datasheet, ComponentLink2URL=http://www.yageo.com/documents/recent/UPY-GPHC_X7R_6.3V-to-50V_18.pdf, Device Class=Ceramic, Size=0603
C26 C28: library part CAP-1U-0002, "CAP CER 1UF 16V X7R 0603", Capacitance="1.0 uF", Voltage=16V, Device Class=Ceramic, Size=0603
C30: library part CAP-100U-0002, "100 µF 50 V Aluminum Electrolytic Capacitors Radial, Can 7000 Hrs @ 105°C", Capacitance=100u, Voltage=50V
D3: library part DIO-TVS-0001, "TVS DIODE 40VWM 64.5VC DO214AA", Current Rating=9.3A, Voltage Rating=64.5V, ComponentLink1Description=Datasheet, ComponentLink1URL=https://www.littelfuse.com/media?resourcetype=datasheets&itemid=09a6ae9a-73cb-4ac4-acac-e6dab92ab953&filename=littelfuse_tvs_diode_smbj_datasheet.pdf
D12: library part DIODE-18V-0001, "30.66V Clamp 20.6A Ipp Tvs Diode Surface Mount DO-214AA (SMBJ)", Clamping Voltage=18V, Manufacturer_Name="Littelfuse Inc", Copyright="Copyright (C) 2025 Ultra Librarian. All rights reserved.", Manufacturer_Part_Number=SMBJ18
D13: library part DIO-TVS-24V, "40.85V Clamp 15.5A Ipp Tvs Diode Surface Mount DO-214AA (SMBJ)", Voltage=24V
D14: library part DIO-TVS-5V, "9.66V Clamp 65.3A Ipp Tvs Diode Surface Mount DO-214AA (SMBJ)", Voltage=5V
D15 D16: library part DIO-TVS-12V, "20.9V Clamp 30.2A Ipp Tvs Diode Surface Mount DO-214AA (SMBJ)", Voltage=12V
I1: library part IC_LDO_3V3_0001, "IC REG LIN 3.3V 800MA SOT223-4", ComponentLink1Description="New link", ComponentLink1URL=https://www.ti.com/lit/ds/symlink/lm1117.pdf?HQS=dis-dk-null-digikeymode-dsf-pf-null-wwe&ts=1721700739746
I2: library part IC_LDO_5V_0001, "IC REG LINEAR 5V 800MA SOT223-4", ComponentLink1Description=Datasheet, ComponentLink1URL=https://www.ti.com/lit/ds/symlink/lm1117.pdf?HQS=dis-dk-null-digikeymode-dsf-pf-null-wwe&ts=1721700739746
J1: library part CONN-Flashing, "Connector Header Surface Mount 14 position 0.050 (1.27mm)", Package=None, Check_prices=https://www.snapeda.com/parts/FTSH-107-01-L-DV-K-A/Samtec+Inc./view-part/?ref=eda, ComponentLink1Description=Datasheet, ComponentLink1URL=https://mm.digikey.com/Volume0/opasdata/d220001/medias/docus/6209/ftsh-1xx-xx-xxx-dv-xxx-xxx-x-xx-mkt.pdf?_gl=1*1c8qhrp*_up*MQ..*_gs*MQ..&gclid=Cj0KCQjwndHEBhDVARIsAGh0g3BhbAROHH0tQxim6dYiCi7CVIKM-WvKYR8T8zWoEwepZ3CPXWTcBI4aAtXsEALw_wcB&gclsrc=aw.ds&gbraid=0AAAAADrbLlju0DZp9CUD_BKsHNp-CszV5, MF="Samtec Inc.", MP=FTSH-107-01-L-DV-K-A, SnapEDA_Link=https://www.snapeda.com/parts/FTSH-107-01-L-DV-K-A/Samtec+Inc./view-part/?ref=snap
J2 J5: library part "Micro-Fit Molex 3 Pin Vertical", Package=43650-0315, DeviceName=43650-0315, DeviceSetName=HEADER_POS3_?, GateName_1=G$1, LibraryName=con-molex-micro-fit-3_0_2, SymbolName_1=HEADER_POS3
J3 J11: library part CONN-8POS-0001, Package=43045-0812, DeviceName=43045-0812, DeviceSetName=HEADER_POS8_?, GateName_1=G$1, LibraryName=con-molex-micro-fit-3_0_2, SymbolName_1=HEADER_POS8
J4: library part CONN-2POS-0003
J6 J7 J8 J9 J10 J12 J13 J30 J31: library part CONN-4POS-0002, "CONN HEADER VERT 4POS 3MM", ComponentLink1Description=Datasheet, ComponentLink1URL=https://www.molex.com/content/dam/molex/molex-dot-com/products/automated/en-us/salesdrawingpdf/430/43045/430450412_sd.pdf?inline
J14 J15 J16 J17 J18 J19 J20 J21 J22 J23 J24 J25 J26 J27 J28 J29: library part CONN-2PIN-0009, "KK 396 PC Board Connector, Top Entry, Polyester Connector, Gold (Au) Selective, 2 Circuits", Manufacturer_Name="Molex Connector Corporation", Copyright="Copyright (C) 2025 Ultra Librarian. All rights reserved.", Manufacturer_Part_Number=09483026, RefDes=RefDes, Type=Type
Q1 Q2 Q5 Q6 Q7 Q8 Q9 Q10 Q11 Q12: library part NMOS-200MA-0001, "MOSFET N-CH 60V 200MA SOT23", Continuous Current=200mA, Voltage=60V, ComponentLink1Description=Datasheet, ComponentLink1URL=https://toshiba.semicon-storage.com/info/T2N7002AK_datasheet_en_20150401.pdf?did=29712&prodName=T2N7002AK
Q3: library part NMOS-200MA-0001, "MOSFET N-CH 60V 200MA SOT23", Manufacturer=Toshiba, Package=SOT-23-3, Assembled?=no, FET type=N-Channel, Id-Continuous=200mA, Manufacturer Part Number=T2N7002AK,LM, Rds On-Max=3.9Ohm, VDS-Max=60V, Vgs-Max=20V
Q4: library part NMOS-60A-0001, "MOSFET N-CH 60V 12A/60A 8VSON", Continuous Current=60A, Voltage=60V, ComponentLink2Description=Datasheet, ComponentLink2URL=http://www.ti.com/lit/ds/symlink/csd18543q3a.pdf
R1 R2: library part RES-470-0001, "RES 470 OHM 1% 1/16W 0402", Power=1/16W, Resistance=470R, Tolerance=1%, ComponentLink1Description=Datasheet, ComponentLink1URL=https://www.yageo.com/upload/media/product/products/datasheet/rchip/PYu-RC_Group_51_RoHS_L_12.pdf, Size=0402
R3: library part RES-120-0001, "RES 120 OHM 1% 1/2W 1210", Power=1/2W, Resistance=120R, Tolerance=1%, ComponentLink1Description=Datasheet, ComponentLink1URL=https://www.yageo.com/upload/media/product/products/datasheet/rchip/PYu-RC_Group_51_RoHS_L_12.pdf, Size=1210
R4 R5: library part RES-100-0001, "RES 100 OHM 1% 1/16W 0402", Power=1/16W, Resistance=100R, Tolerance=1%, ComponentLink1Description=Datasheet, ComponentLink1URL=https://www.yageo.com/upload/media/product/products/datasheet/rchip/PYu-RC_Group_51_RoHS_L_12.pdf, Size=0402
R6 R7 R8 R12 R13 R14 R18 R19: library part RES-0.5m-0001, "2512 Chip Resistor - Surface Mount ROHS", Power=3W, Resistance=0.5m, Tolerance=1%, ComponentLink1Description=Datasheet, ComponentLink1URL=https://www.yageo.com/upload/media/product/products/datasheet/rchip/PYu-RC_Group_51_RoHS_L_12.pdf, Size=0402
R9 R10 R11 R15 R16 R17 R20 R21 R23 R24 R25 R44 R45 R48 R50 R51: library part RES-10k-0001, "RES 10K OHM 1% 1/16W 0402", Power=1/16W, Resistance=10k, Tolerance=1%, ComponentLink1Description=Datasheet, ComponentLink1URL=https://www.yageo.com/upload/media/product/products/datasheet/rchip/PYu-RC_Group_51_RoHS_L_12.pdf, Size=0402
R22: library part RES-0-0001, "0 Ohms Jumper 0.1W, 1/10W Chip Resistor 0603 (1608 Metric) Automotive AEC-Q200 Thick Film", Package Size=0603, Power="1/10 W", Resistance=10kOhm
R26: library part RES-200k-0001, "RES SMD 200K OHM 1% 1/10W 0603", Power=100mW, Resistance=200k, Tolerance=1%, ComponentLink1Description=Datasheet, ComponentLink1URL=https://www.yageo.com/upload/media/product/products/datasheet/rchip/PYu-RC_Group_51_RoHS_L_12.pdf, Size=0603
R27: library part RES-100k-0001, "RES SMD 100K OHM 1% 1/10W 0603", Power=100mW, Resistance=100k, Tolerance=1%, ComponentLink1Description=Datasheet, ComponentLink1URL=https://www.yageo.com/upload/media/product/products/datasheet/rchip/PYu-RC_Group_51_RoHS_L_12.pdf, Size=0603
R28 R29 R30 R31 R40 R41 R42 R43: library part RES-100-0002, "100 Ohms ±5% 2W Chip Resistor 2512 (6332 Metric) Automotive AEC-Q200, Pulse Withstanding Thick Film", Power=2W, Resistance=100
R32 R33: library part RES-150K-0001, "150 kOhms ±5% 0.063W, 1/16W Chip Resistor 0402 (1005 Metric) Moisture Resistant Thick Film", Power=1/16W, Resistance="150k +/- 5%"
R34: library part RES-107k-0001, "107 kOhms ±1% 0.1W, 1/10W Chip Resistor 0603 (1608 Metric) Moisture Resistant Thick Film", Power="1/10 W", Resistance=107k
R35 R46: library part RES-260k-0001, "RES SMD 274K OHM 1% 1/10W 0402", Power=1/10W, Resistance=260k
R36 R37 R38: library part RES-22k-0001, "22 kOhms ±1% 0.1W, 1/10W Chip Resistor 0603 (1608 Metric) Moisture Resistant Thick Film", Power=1/10W, Resistance=22K
R39 R49: library part RES-100k-0002, "100 kOhms ±1% 0.063W, 1/16W Chip Resistor 0402 (1005 Metric) Moisture Resistant Thick Film", Power=1/16W, Resistance=100k
R47: library part RES-1k-0001, "RES 1K OHM 1% 1/16W 0402", Power=1/16W, Resistance=1k, Tolerance=1%, ComponentLink1Description=Datasheet, ComponentLink1URL=https://www.yageo.com/upload/media/product/products/datasheet/rchip/PYu-RC_Group_51_RoHS_L_12.pdf, Size=0402
U1: library part IC-CAN-0001, "IC TRANSCEIVER 1/1 8SOIC", ComponentLink1Description=Datasheet, ComponentLink1URL=https://www.ti.com/lit/ds/symlink/tcan1044-q1.pdf?HQS=dis-dk-null-digikeymode-dsf-pf-null-wwe&ts=1728758303289&ref_url=https%253A%252F%252Fwww.ti.com%252Fgeneral%252Fdocs%252Fsuppproductinfo.tsp%253FdistId%253D10%2526gotoUrl%253Dhttps%253A%252F%252Fwww.ti.com%252Flit%252Fgpn%252Ftcan1044-q1
U2 U3 U4 U5 U6 U7 U8 U9: library part IC-CURR-0001, "Current Sense Amplifier 1 Circuit 8-MSOP"
U10: library part IC-STM32G431CBT6, "IC MCU 32BIT 128KB FLASH 48LQFP", Package=48LQFP, ComponentLink1Description=Datasheet, ComponentLink1URL=https://www.st.com/resource/en/datasheet/stm32g431cb.pdf
X1: library part HEADER_POS2_?43045-0212, Package=43045-0212, DeviceName=43045-0212, DeviceSetName=HEADER_POS2_?, GateName_1=G$1, LibraryName=con-molex-micro-fit-3_0_2, SymbolName_1=HEADER_POS2

## Free pads (board coordinates)
  round 6.35 hole 3.7: 3(8.763,30.149) 3(8.763,54.355) 3(8.763,102.921) 3(8.763,78.918) 3(79.883,39.877) 3(79.883,63.88) 3(79.883,112.471) 3(79.883,88.443) 3(113.792,54.356) 3(114.046,30.226) 3(114.3,78.867) 3(114.3,102.87) 3(184.912,63.881) 3(185.166,39.751) 3(185.42,88.392) 3(185.42,112.395)
  round 6.35 hole 3.5: 3(8.763,132.461) 3(96.901,77.978) 3(230.251,30.149) 3(230.251,132.461)

## Via types
v1: diameter 0.506, hole 0.206, Top Layer to Bottom Layer, 533 vias
v2: diameter 0.508, hole 0.203, Top Layer to Bottom Layer, 204 vias
v3: diameter 1.27, hole 0.7, Top Layer to Bottom Layer, 34 vias
v4: diameter 1.27, hole 0.711, Top Layer to Bottom Layer, 1 vias

## Nets (pads, with @x,y where several pads share a name; then routed paths per layer and width w, separated by ;. In a path a pad name is that pad's centre, name@x,y a point inside that pad or via, vN(x,y) a via of type N, cw(c..) or ccw(c..) an arc to the next point about the centre after c; other vN are vias at no path point)
3V3_AUTONLED_C: J12.1@30.329,132.207 J12.2 R8.1 U4.1 | length 4.1
  Top Layer w0.254: R8.1@123.977,85.296 126.794,85.296 127.279,84.811 U4.1@127.279,84.173
  other v3: 122.936,83.566 124.714,83.566 122.936,85.344 124.714,85.344
3V3_IN: J22.1 R8.2 R47.2 U4.8 | length 105.2
  Top Layer w0.254: U4.8@127.279,89.717 127.215,89.781 127.215,91.199 129.057,93.041 133.099,93.041 133.176,92.964 v2(137.287,92.964) ; v2(152.146,74.168) v2(161.163,65.151)
  Bottom Layer w0.254: v2(137.287,92.964) 137.287,89.027 v2(152.146,74.168) ; v2(161.163,65.151) 167.342,58.972 167.342,58.928 205.259,58.928 205.64,59.309 v2(213.487,59.309)
5V_BUCK_C: J3.4 J11.1 J11.2 J11.3 J11.4 J13.1@54.054,132.159 J13.2 J31.1@41.687,132.21 J31.2 R14.1 U7.1 | length 4
  Top Layer w0.254: R14.1@124.739,108.282 125.337,107.684 127.633,107.684 127.787,107.53 U7.1@127.787,106.906
5V_IN: D14.1 J15.1 R14.2 R45.2 U7.8 | length 107.8
  Top Layer w0.254: U7.8@127.787,112.45 127.787,113.179 129.747,115.139 134.499,115.139 138.049,111.589 v2(138.049,110.744) ; v2(167.787,94.471) 167.805,94.489 178.102,94.489 v2(178.12,94.506)
  Bottom Layer w0.254: v2(138.049,110.744) 138.049,109.322 152.9,94.471 v2(167.787,94.471) ; v2(178.12,94.506) 187.315,94.506 v2(213.368,68.453)
5V_LDO: 5V_LDO.1 C9.2 C10.2 C11.2 C12.2 C16.2 I2.2 I2.4 R28.2 R29.2 R30.2 R31.2 R40.2 R41.2 R42.2 R43.2 U1.3 | length 29.5
  Top Layer w0.254: U1.3@206.843,108.585 205.74,108.585 205.105,107.95 205.105,104.394 206.248,103.251 206.248,93.853 211.836,88.265 211.836,85.471 211.455,85.09 209.812,85.09 C11.2@209.804,85.098
7V_BUCK_C: C13.2 C15.2 I1.3 I2.3 R13.1 U6.1 | length 4.3
  Top Layer w0.254: U6.1@171.094,39.701 171.094,39.063 171.6,38.557 R13.1@174.523,38.557
7V_IN: J25.1 R13.2 R44.2 U6.8 | length 33.9
  Top Layer w0.254: J25.1@184.76,28.93 193.295,37.465 209.304,37.465 213.145,41.306 213.195,41.306 213.368,41.479 R44.2@213.368,41.529
12V_ELSE_IN: D16.1 J24.1 R12.2 R46.2 U5.8 | length 49.2
  Top Layer w0.254: J24.1@182.603,52.578 184.023,51.158 v2(184.023,50.038) ; v2(192.532,38.608) 192.786,38.354 208.661,38.354 213.368,43.061 R46.2@213.368,50.673
  Bottom Layer w0.254: v2(184.023,50.038) 184.023,46.101 191.516,38.608 v2(192.532,38.608)
12V_FANS_C: J10.1@136.906,131.874 J10.2 J30.1@148.566,131.826 J30.2 R18.1 R35.2 U8.1 | length 127.2
  Top Layer w0.254: R18.1@18.796,62.485 21.868,62.485 22.352,62.001 U8.1@22.352,61.363 ; v2(151.257,73.152) 159.971,64.438 160.352,64.438 v2(160.401,64.389)
  Bottom Layer w0.254: J10.2@133.858,131.699 133.858,125.008 136.779,122.087 136.779,87.376 150.954,73.201 151.208,73.201 v2(151.257,73.152) ; v2(160.401,64.389) 160.406,64.384 160.787,64.384 167.156,58.015 183.412,58.015 184.658,56.769 192.786,56.769 192.86,56.695 v2(198.882,50.673)
  other v3: 58.293,94.488 60.071,94.488 61.722,94.488 58.293,96.266 60.071,96.266 61.722,96.266 121.158,129.032 122.936,129.032 124.587,129.032 121.158,130.81 122.936,130.81 124.587,130.81
12V_FANS_IN: D15.1 J23.1 R18.2 U8.8
12V_REST_C: J6.1@160.147,131.826 J6.2 J20.1 J29.1 R12.1 U5.1 | length 5.5
  Top Layer w0.254: v3(166.497,102.997) v3(168.275,102.997) ; U5.1@170.028,56.927 171.183,56.927 172.305,55.805 R12.1@173.33,55.805
  other v3: 164.719,99.568 166.497,99.568 168.275,99.568 164.719,101.219 166.497,101.219 168.275,101.219 164.719,102.997
18V_BUCK_C: J8.1@19.28,132.207 J8.2 R7.1 R34.2 U3.1 | length 240.2
  Top Layer w0.254: U3.1@21.336,110.241 21.336,110.031 21.182,109.877 18.267,109.877 R7.1@17.78,110.364 16.755,110.364 16.157,109.766 16.157,107.787 14.287,105.918 14.287,103.188 6.35,95.25 6.35,85.979 9.525,82.804 11.43,82.804 18.796,75.438 v2(40.386,75.438) ; v2(133.502,72.467) 145.376,72.467 154.012,81.103 166.039,81.103 v2(171.196,75.946)
  Bottom Layer w0.254: v2(40.386,75.438) 43.357,72.467 v2(133.502,72.467) ; v2(171.196,75.946) 178.435,68.707 v2(198.463,68.707)
18V_IN: D12.1 J14.1 R7.2 U3.8 | length 1
  Top Layer w0.254: R7.2@16.755,113.664 R7.2@17.78,113.664
24V_BUCK_C: J9.1@204.192,131.318 J9.2 R6.1 R33.2 U2.1 | length 104
  Top Layer w0.254: R6.1@28.058,89.534 R6.1@29.083,89.534 ; v2(213.175,96.073) v2(218.89,101.788)
  Bottom Layer w0.254: v2(198.59,59.817) 198.59,61.557 205.486,68.453 209.091,68.453 209.98,67.564 213.487,67.564 214.376,68.453 214.376,74.041 213.175,75.242 v2(213.175,96.073) ; J9.1@204.192,131.366 210.01,131.366 211.836,129.54 214.757,129.54 223.647,120.65 223.647,105.024 220.412,101.788 v2(218.89,101.788)
24V_BUCK_LA_C: J7.1@215.392,131.318 J7.2 R19.1 U9.1 | length 4.9
  Top Layer w0.254: R19.1@19.177,38.101 19.431,38.355 v2(19.431,38.481) v2(20.32,38.481) 20.32,38.41 20.8,37.93 22.129,37.93 22.606,37.453 U9.1@22.606,36.725
  other v2: 17.907,37.592 18.669,37.592 19.431,37.592 20.32,37.846 17.907,38.481 18.669,38.481
  other v3: 172.466,108.839 174.244,108.839 176.022,108.839 172.466,110.49 174.244,110.49 176.022,110.49 172.466,112.268 174.244,112.268 176.022,112.268
24V_ELSE_IN: J17.1 R6.2 U2.8 | length 1
  Top Layer w0.254: R6.2@28.058,86.234 R6.2@29.083,86.234
24V_LA_IN: D13.1 J16.1 R19.2 R32.2 U9.8 | length 198.2
  Top Layer w0.254: v2(132.969,70.993) v2(145.796,58.166)
  Bottom Layer w0.254: v2(22.784,47.244) 23.698,48.158 23.698,48.482 46.21,70.993 v2(132.969,70.993) ; v2(145.796,58.166) 149.048,54.914 185.332,54.914 v2(198.717,41.529)
AUTON_LED_B: J3.1 R25.1 U10.42 | length 137.4
  Top Layer w0.254: J3.1@93.132,131.912 98.552,126.492 130.585,126.492 130.712,126.619 v2(162.814,126.619) ; U10.42@208.847,116.989 R25.1@212.949,116.951
  Bottom Layer w0.254: v2(162.814,126.619) 208.153,126.619 214.376,120.396 214.376,119.043 215.011,118.408 215.011,116.713 214.249,115.951 213.233,115.951 212.95,116.234 v2(212.95,116.979)
AUTON_LED_G: J3.2 R24.1 U10.43 | length 134.1
  Top Layer w0.254: J3.2@90.736,131.641 96.647,125.73 v2(162.56,125.73) ; U10.43@208.847,117.483 211.54,117.483 212.165,118.108 R24.1@212.95,118.108
  Bottom Layer w0.254: v2(162.56,125.73) 207.772,125.73 213.614,119.888 213.614,118.801 v2(212.95,118.137)
AUTON_LED_R: J3.3 R23.1 U10.44 | length 135.3
  Top Layer w0.254: J3.3@87.4,131.572 87.491,131.572 93.968,125.095 162.284,125.095 162.538,124.841 v2(162.56,124.841) ; U10.44@208.847,117.995 211.417,117.995 212.687,119.265 R23.1@212.958,119.265
  Bottom Layer w0.254: v2(162.56,124.841) 207.411,124.841 v2(212.958,119.294)
CAN_N: J2.P$2 J5.P$2 R3.2 U1.6 | length 98.1
  Top Layer w0.102: U1.6@201.838,108.59 U1.6@201.843,108.585
  Top Layer w0.254: v2(198.882,108.59) U1.6@201.838,108.59
  Bottom Layer w0.254: J2.P$2@174.546,132.334 173.373,132.334 173.224,132.483 173.224,132.693 174.011,133.48 175.021,133.48 175.895,132.606 175.895,131.069 178.796,128.168 183.995,128.168 187.527,131.7 187.527,132.058 187.676,132.207 ; J5.P$2@188.849,132.207 187.676,132.207 ; v2(198.882,108.59) 198.882,107.644 199.031,107.495 202.491,107.495 204.953,109.957 209.042,109.957 210.768,111.683 220.273,111.683 220.853,112.263 220.853,118.872 211.328,128.397 192.532,128.397 192.324,128.605 190.119,130.81 190.119,132.558 189.324,133.353 188.314,133.353 187.527,132.566 187.527,132.356 187.676,132.207
CAN_P: J2.P$3 J5.P$3 R3.1 U1.7 | length 101
  Top Layer w0.381: R3.1@198.882,106.04 199.044,106.202 199.044,107.092 199.268,107.315 U1.7@201.843,107.315
  Bottom Layer w0.254: J2.P$3@171.546,132.334 172.719,132.334 172.868,132.483 172.868,132.841 173.863,133.836 175.168,133.836 176.251,132.753 176.251,131.216 178.943,128.524 183.847,128.524 187.171,131.848 187.171,132.058 187.022,132.207 ; J5.P$3@185.849,132.207 187.022,132.207 ; v2(198.882,106.045) 198.882,106.991 199.031,107.14 202.639,107.14 205.1,109.601 209.189,109.601 210.915,111.327 220.42,111.327 221.209,112.116 221.209,119.019 211.475,128.753 192.679,128.753 190.475,130.957 190.475,132.705 189.471,133.709 188.166,133.709 187.171,132.714 187.171,132.356 187.022,132.207
CAN_RX_LED: R2.2 U10.30 | length 9.4
  Top Layer w0.254: R2.2@196.91,110.617 203.706,110.617 204.336,111.247 U10.30@204.336,112.971
CAN_STB: U1.8 U10.32 | length 21.2
  Top Layer w0.254: U1.8@201.843,106.045 200.787,106.045 200.5,105.758 200.5,103.996 202.706,101.79 205.502,101.79 205.725,102.013 205.725,103.012 204.597,104.14 204.597,108.16 205.359,108.922 205.359,109.855 U10.32@205.347,112.971
CAN_TX_LED: R1.2 U10.31 | length 9
  Top Layer w0.254: R1.2@203.327,104.648 203.327,109.01 204.844,110.526 U10.31@204.844,112.971
CURR_3V3_BUCK: C3.1 R11.2 U10.26 | length 91
  Top Layer w0.254: C3.1@132.994,86.983 132.867,87.11 R11.2@132.867,88.604 135.272,91.009 163.145,91.009 168.529,96.393 v2(178.181,96.393) ; v2@189.357,96.647 190.5,97.79 v2(190.5,112.141) ; v2(192.532,113.157) 193.294,113.157 194.564,111.887 201.93,111.887 202.322,112.279 202.322,112.946 U10.26@202.347,112.971
  Bottom Layer w0.254: v2(178.181,96.393) 183.681,96.393 183.808,96.52 v2(189.357,96.52) ; v2(190.5,112.141) 191.516,113.157 v2(192.532,113.157)
CURR_5V_BUCK: C6.1 R17.2 U10.16 | length 73.6
  Top Layer w0.254: R17.2@133.375,111.583 133.375,110.224 133.617,109.982 133.871,110.236 148.209,110.236 v2(157.861,119.888) ; v2(187.706,117.856) 195.072,117.856 195.687,118.471 U10.16@200.347,118.471
  Bottom Layer w0.254: v2(157.861,119.888) 159.893,117.856 v2(187.706,117.856)